# EAGLE board ÖDEV 5 (EAGLE 7.6.0)

Size 73.58 x 76.09 mm. Coordinates in mm from the lower left corner, seen from the top.
Outline: 0,0 56.82,0 56.82,53.33 0,53.33 0,0
Copper layers (1*16): Top 0.035mm / dielectric 1.5mm / Bottom 0.035mm
Design rules "default": minimum track width 10mil, minimum drill 24mil, track to track 8mil, track to pad 8mil, pad to pad 8mil, via to via 8mil, smd to smd 8mil, copper to edge 40mil, drill to drill 8mil, minimum pad ring 10mil, minimum via ring 8mil, stop-mask expansion 4mil, vias tented up to drill 0mil, thermal gap 10mil

## Footprints (pad centres in the part's own frame; a part is rotated, then mirrored left to right if it is on the bottom)
LED5MM = drill 0.813 octagon: A -1.27,0; K 1.27,0
2P-2.54-65/35MIL = drill 0.889 pad 1.651 square: 1 0,1.27 | drill 0.889 pad 1.651: 2 0,-1.27
0207/10 = drill 0.813 octagon: 1 -5.08,0; 2 5.08,0
B25V = drill 0.813 long: A 2.54,0.635; E -2.54,0.635; S 0,0.635
1X3P-2.54-2.54-11.6-3.0-BLACK-MALE = drill 0.889 pad 1.651 square: 1 0,2.54 | drill 0.889 pad 1.651: 2 0,0; 3 0,-2.54
TL1105 = drill 1 pad 1.676: 1 -2.25,3.25; 2 2.25,3.25; 3 -2.25,-3.25; 4 2.25,-3.25
ARDUINO_UNO = drill 1.016 pad 1.88: 0 63.5,50.8; 1 60.96,50.8; 2 58.42,50.8; 3 55.88,50.8; 3.3V 35.56,2.54; 4 53.34,50.8; 5 50.8,50.8; 5V 38.1,2.54; 6 48.26,50.8; 7 45.72,50.8; 8 41.656,50.8; 9 39.116,50.8; 10 36.576,50.8; 11 34.036,50.8; 12 31.496,50.8; 13 28.956,50.8; A0 50.8,2.54; A1 53.34,2.54; A2 55.88,2.54; A3 58.42,2.54; A4 60.96,2.54; A5 63.5,2.54; AREF 23.876,50.8; GND 26.416,50.8; GND. 43.18,2.54; GND.. 40.64,2.54; I/OREF 30.48,2.54; N/C 27.94,2.54; RESET 33.02,2.54; SCL 18.796,50.8; SDA 21.336,50.8; VIN 45.72,2.54 | hole 3.2: 66.04,7.62; 66.04,35.56; 15.24,50.8; 13.97,2.54

## Placement (x,y rotation side)
Dgeri  [LED5MM]  5,111.68 0 top  (outside the outline)
Dileri  [LED5MM]  5,98.98 0 top  (outside the outline)
M1  [2P-2.54-65/35MIL]  5,149.78 0 top  (outside the outline)
R1  1k‎Ω  [0207/10]  5,124.38 0 top  (outside the outline)
R2  1k‎Ω  [0207/10]  5,162.48 0 top  (outside the outline)
R3  1k‎Ω  [0207/10]  5,137.08 0 top  (outside the outline)
R4  1k‎Ω  [0207/10]  5,175.18 0 top  (outside the outline)
Rpot1  1k‎Ω  [B25V]  5,35.48 0 top
Rpot2  1k‎Ω  [B25V]  5,48.18 0 top
SERVO1  [1X3P-2.54-2.54-11.6-3.0-BLACK-MALE]  5,86.28 0 top  (outside the outline)
Sgeri  [TL1105]  5,60.88 0 top
Sileri  [TL1105]  5,73.58 0 top
U1  [ARDUINO_UNO]  5,10.08 0 top
U2  [ARDUINO_UNO]  5,22.78 0 top

## Library data of the parts
Dgeri Dileri M1 R1-R4 Rpot1 Rpot2 SERVO1 Sgeri Sileri U1 U2 = AUTODESK_CIRCUITS_BREADBOARD

## Nets
N$1: Rpot1.S U1.A0
N$2: Rpot2.S U1.A1
N$3: SERVO1.2 U2.5V
N$4: SERVO1.1 U2.GND..
N$5: SERVO1.3 U2.0
N$6: Sgeri.4
N$7: Sgeri.1
N$8: Sileri.4
N$9: Sileri.1
N$10: U1.11 U2.A0
N$11: U1.10 U2.A1
N$12: U1.9 U2.9
N$13: U1.8 U2.8
N$14: Dgeri.A R4.1
N$15: Dileri.A R2.1
N$16: Rpot1.E Rpot2.E Sgeri.2 Sileri.2 U1.5V
N$17: R3.2 Sileri.3 U1.13
N$18: R1.2 Sgeri.3 U1.12
N$19: Dgeri.K Dileri.K U2.GND.
N$20: R1.1 R3.1 Rpot1.A Rpot2.A U1.GND.
N$21: M1.1 R4.2 U2.12
N$22: M1.2 R2.2 U2.13

## Tracks (layer width: path | path; a pad name or v marks a point on that pad's centre or on a via)
N$1  (1 unrouted)
N$2  (1 unrouted)
N$3  (1 unrouted)
N$4  (1 unrouted)
N$5  (1 unrouted)
N$10  (1 unrouted)
N$11  (1 unrouted)
N$12  (1 unrouted)
N$13  (1 unrouted)
N$14  (1 unrouted)
N$15  (1 unrouted)
N$16  (4 unrouted)
N$17  (2 unrouted)
N$18  (2 unrouted)
N$19  (2 unrouted)
N$20  (4 unrouted)
N$21  (2 unrouted)
N$22  (2 unrouted)